# EAGLE board test_eagle (EAGLE 6.6.0)
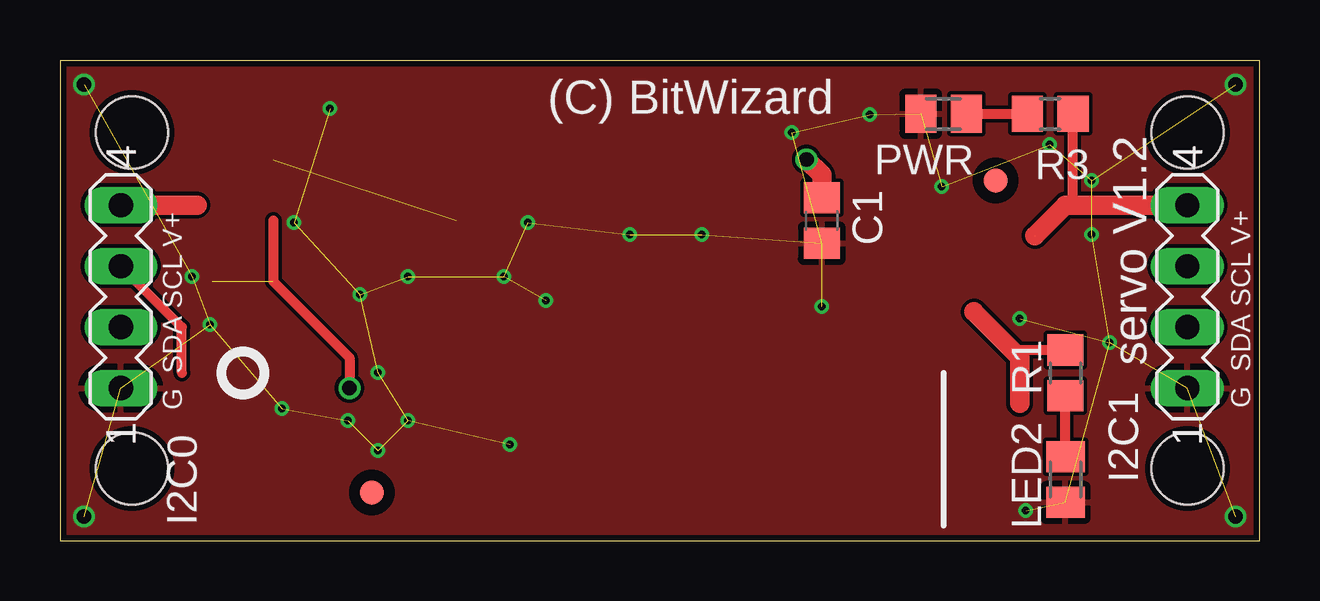
[diagram p0: board, top side]
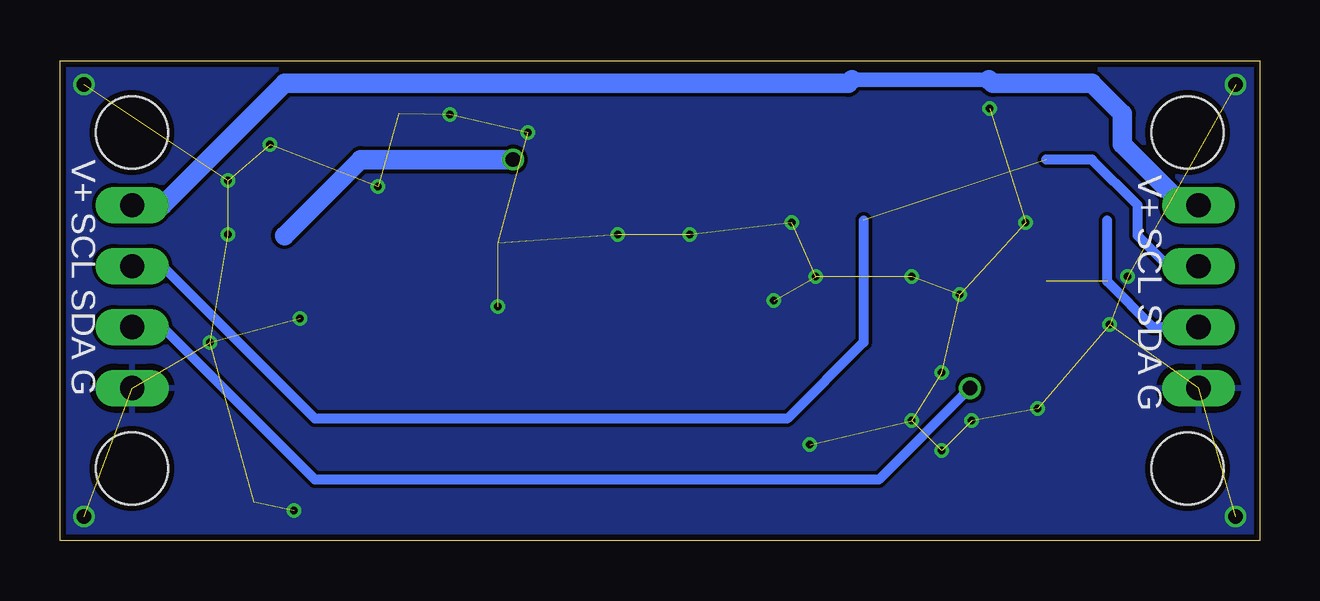
[diagram p1: board, bottom side, seen from below]

Size 50 x 20 mm. Coordinates in mm from the lower left corner, seen from the top.
Outline: 0,0 50,0 50,20 0,20 0,0
Copper layers (1*16): Top 0.035mm / dielectric 1.5mm / Bottom 0.035mm
Design rules "Fusion_eagle_rule_v1.1": minimum track width 6mil, minimum drill 12mil, track to track 6mil, track to pad 6mil, pad to pad 6mil, via to via 6mil, smd to smd 0mil, copper to edge 10mil, drill to drill 10mil, minimum pad ring 7mil, minimum via ring 6mil, stop-mask expansion 2mil, vias tented up to drill 100mil, thermal gap 10mil

## Footprints (pad centres in the part's own frame; a part is rotated, then mirrored left to right if it is on the bottom)
FID1 = smd 1 x 1: P$1 0,0
C0805 = smd 1.3 x 1.5: 1 -0.95,0; 2 0.95,0
MA04-1 = drill 1.016 long: 1 -3.81,0; 2 -1.27,0; 3 1.27,0; 4 3.81,0
M0805 = smd 1.3 x 1.6: 1 -0.95,0; 2 0.95,0
R0805 = smd 1.3 x 1.5: 1 -0.95,0; 2 0.95,0
MOUNTING_HOLE = hole 3: 0,0

## Placement (x,y rotation side)
AFIT1  FIDUCIAL1  [FID1]  13,2 0 top
AFIT2  FIDUCIAL1  [FID1]  39,15 0 top
C1  100n  [C0805]  31.75,13.34 270 top
I2C0  [MA04-1]  2.54,10.16 90 top
I2C1  [MA04-1]  46.99,10.16 90 top
LED2  G  [M0805]  41.91,2.54 270 top
PWR  G  [M0805]  36.83,17.78 180 top
R1  47k  [R0805]  41.91,6.99 90 top
R3  47k  [R0805]  41.27,17.78 0 top
U$2  MOUNTING_HOLE  [MOUNTING_HOLE]  3,3 0 top
U$3  MOUNTING_HOLE  [MOUNTING_HOLE]  3,17 0 top
U$4  MOUNTING_HOLE  [MOUNTING_HOLE]  47,3 0 top
U$5  MOUNTING_HOLE  [MOUNTING_HOLE]  47,17 0 top

## Library data of the parts
AFIT1 AFIT2 U$2-U$5 = hdr_altera
C1 R1 R3 = rcl
I2C0 I2C1 = con-lstb; OC_FARNELL: unknown; OC_NEWARK: unknown
LED2 PWR = myled

## Nets
GND: C1.2 I2C0.1 I2C1.1 LED2.2 PWR.2
N$1: I2C0.2 I2C1.2
N$6: PWR.1 R3.1
N$13: I2C0.3 I2C1.3
N$14: R1.2
N$15: LED2.1 R1.1
VCC: C1.1 I2C0.4 I2C1.4 R3.2

## Tracks (layer width: path | path; a pad name or v marks a point on that pad's centre or on a via)
GND  (via drill 0.3, 0.61)  (35 unrouted)
  other vias: 1,19 1,1 49,1 49,19 12,5 13.25,3.75 14.5,5 13.25,7 9.25,5.5 12.5,10.25 19.5,13.25 20.25,10 18.5,11 23.75,12.75 26.75,12.75 11.25,18 5.5,11 6.25,9 14.5,11 9.75,13.25 18.75,4 31.75,9.75 30.5,17 33.75,17.75 36.75,14.75 41.25,16.5 43,15 43,12.75 40.25,1.25 43.75,8.25 40,9.25
  pour Top: 0,20 0,0 50,0 50,20
  pour Bottom: 0,20 50,20 50,0 0,0
N$1  (via drill 0.61)  (1 unrouted)
  Top 0.406: 8.89,13.34 8.89,10.79 12.06,7.62 v12.06,6.35
  Bottom 0.406: I2C0.2 4.45,8.89 6.35,10.79 6.35,13.34 | v12.06,6.35 15.88,2.54 39.37,2.54 45.72,8.89 I2C1.2
N$6
  Top 0.406: PWR.1 R3.1
N$13  (1 unrouted)
  Top 0.406: 5.08,6.99 5.08,8.89 I2C0.3
  Bottom 0.406: 16.51,13.34 16.51,8.26 19.68,5.08 39.37,5.08 45.72,11.43 I2C1.3 | I2C0.3 3.81,11.43 5.08,12.7 5.08,13.97 6.99,15.88 8.89,15.88
N$14
  Top 0.406: R1.2 40.01,7.93 40.01,7.62
  Top 0.813: 40.01,5.71 40.01,7.62 38.1,9.53
N$15
  Top 0.406: LED2.1 R1.1
VCC  (via drill 0.61)  (1 unrouted)
  Top 0.406: v31.11,15.88 31.05,15.94 | 42.23,13.97 R3.2
  Top 0.813: v31.11,15.88 31.75,15.24 C1.1 32.07,14.29 | 5.71,13.97 I2C0.4 | I2C1.4 44.45,13.97 42.23,13.97 41.91,13.97 40.64,12.7
  Bottom 0.61: 11.27,19.21 16.99,19.21
  Bottom 0.813: v31.11,15.88 37.47,15.88 40.64,12.7 | I2C0.4 3.17,13.97 5.71,16.51 5.71,17.78 6.99,19.05 11.11,19.05 11.27,19.21 | I2C1.4 45.72,13.97 40.64,19.05 17.14,19.05 16.99,19.21

## Text on the board
tPlace: (C) BitWizard | servo V1.2 | G SDA SCL V+ | G SDA SCL V+
bPlace: V+ SCL SDA G | V+ SCL SDA G
tNames: I2C1 | I2C0
_tNames: PWR | IC1 | C1 | R3 | SV2 | SPI1 | SPI0 | SV1 | R1 | LED2
_bNames: SJ1